# Altium PCB ERM_OPTO_Long.PcbDoc (part 2 of 2)
Units mil, origin at the board's own origin, x right, y up, seen from the top; angles counter-clockwise.
Board outline 4606.3 x 1102.36 mil, 7 copper layers (Layer_1 Top, Layer_2 GND Plane 1, Layer_3 Inner Signal 1, Layer_4 GND Plane 2, Layer_5 Inner Signal 2, Layer_6 GND Plane 3, Layer_7 Bottom), stack 37.12 mil thick; 33 components, 65 nets, 204 pads, 130 vias.
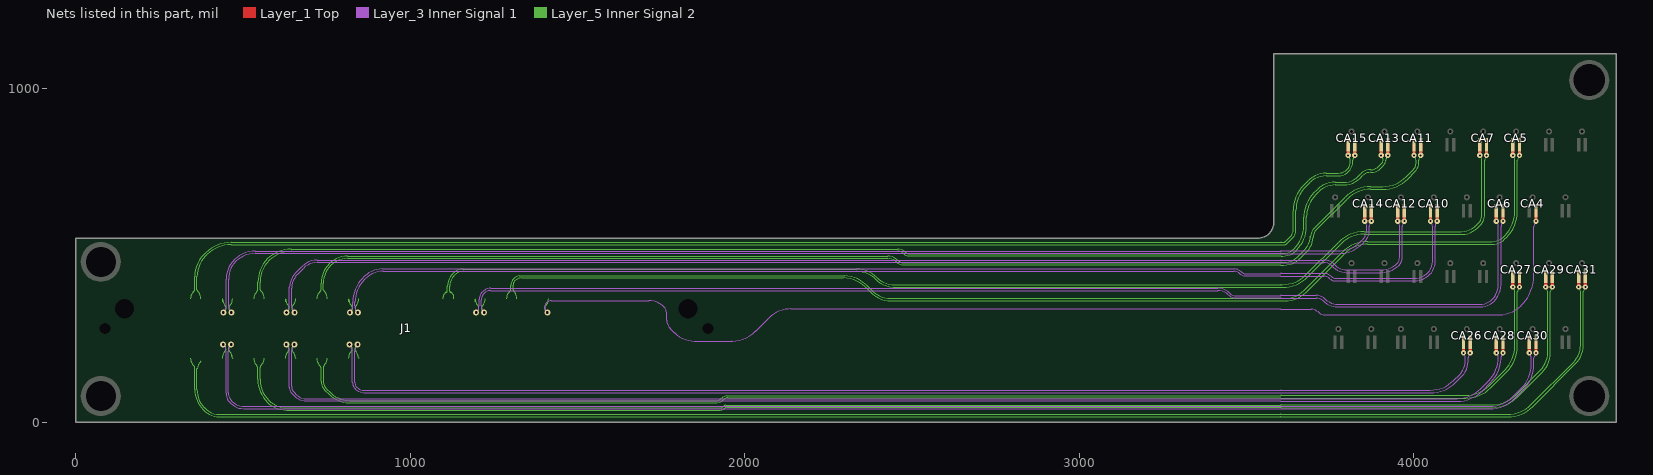
[diagram p7: the nets of this part, all layers, seen from the top]

## Via types
v1: diameter 18, hole 8, Layer_3 Inner Signal 1 to Layer_5 Inner Signal 2, tented both sides, 66 vias
v2: diameter 16, hole 6, Layer_1 Top to Layer_7 Bottom, tented both sides, 64 vias

## Nets (pads, with @x,y where several pads share a name; then routed paths per layer and width w, separated by ;. In a path a pad name is that pad's centre, name@x,y a point inside that pad or via, vN(x,y) a via of type N, cw(c..) or ccw(c..) an arc to the next point about the centre after c; other vN are vias at no path point) (continued)
UPLINK8_P: CA4.1 J1.24 | length 3404
  Layer_1 Top w10: v2(4366.3,601.73) CA4.1@4366.3,633.23
  Layer_3 Inner Signal 1 w2.95: v1(1410.23,328.57) 1406.13,332.66 cw(c1417.97,344.5) 1402.85,337.3 cw(c1417.97,344.5) 1401.85,339.97 cw(c1404.7,340.74) 1401.92,341.73 1401.92,345.13 cw(c1419.57,345.13) 1407.14,357.66 cw(c1422.4,342.3) 1422.4,363.95 1712.77,363.95 cw(c1712.77,297.57) 1759.74,344.48 cw(c1743.54,328.34) 1766.41,328.34 1766.41,306.83 cw(c1763.6,305.91) 1766.54,306.16 ccw(c1810.28,309.6) 1776.92,281.1 cw(c1774.66,279.2) 1777.3,280.54 1779.18,278.66 cw(c1777.11,276.55) 1779.25,278.58 1779.32,278.51 1788.01,269.83 ; 1788.04,269.8 1788.13,269.71 ; 1788.16,269.68 1789.68,268.16 ; 1789.68,268.15 ccw(c1791.79,270.22) 1789.72,268.11 1790.03,267.81 cw(c1788.4,265.34) 1790.4,267.51 ccw(c1852.67,334.37) 1849.43,243.06 cw(c1849.31,240.11) 1849.9,243.01 1962.08,243.01 cw(c1962.62,240.1) 1962.52,243.06 ccw(c1959.31,349.7) 2032.45,272.02 cw(c2034.46,269.86) 2032.79,272.3 2072.63,312.14 cw(c2138.64,246.19) 2084.37,322.09 cw(c2142.94,235.17) 2121.95,337.86 cw(c2142.94,235.17) 2122.08,337.89 cw(c2138.15,246.68) 2138.15,339.29 3602.48,339.29 cw(c3602.48,337.59) 3603.68,338.79 3603.95,338.52 3695.08,338.52 cw(c3695.08,310.63) 3714.8,330.35 ; 3714.82,330.33 ccw(c3734.64,350.15) 3734.64,322.13 4256.21,322.13 ccw(c4256.21,415.86) 4322.49,349.58 4322.72,349.81 ccw(c4231.91,440.62) 4346.37,382.39 ccw(c4231.91,440.62) 4360.33,440.62 4360.33,587.33 cw(c4375.17,587.33) 4362.05,594.25 cw(c4375.17,587.33) 4364.68,597.82 ccw(c4360.77,601.73) v2(4366.3,601.73)
  Layer_5 Inner Signal 2 w3: v1(1410.23,328.57) 1405.57,333.22 cw(c1414.75,342.39) 1401.78,342.39 cw(c1409.97,342.39) 1404.16,348.17 1405.33,349.34 ccw(c1385.17,369.5) J1.24@1413.68,369.5
UPLINK9_N: CA5.2 J1.32 | length 3401.1
  Layer_1 Top w10: v2(4297.09,798.58) CA5.2@4297.09,830.08
  Layer_5 Inner Signal 2 w2.95: J1.32@1287.7,369.5 cw(c1317.32,369.5) 1296.37,390.45 1297.26,391.33 ccw(c1289.57,399.02) 1300.44,399.02 1300.44,408.76 cw(c1328.14,408.76) 1308.56,428.34 cw(c1332.78,406.96) 1326.53,438.66 1330.71,438.66 1336.25,438.66 2298.68,438.66 cw(c2296,341.35) 2363.16,411.82 2381.17,393.81 ccw(c2437.07,449.67) 2437.07,370.64 3602.6,370.64 cw(c3604.07,369.17) 3604.07,371.25 3615.55,371.25 ccw(c3615.55,453.08) 3673.41,395.22 3787.41,509.22 cw(c3863.71,432.93) 3863.71,540.83 4235.18,540.83 ccw(c4235.18,587.34) 4268.07,554.45 4273.76,560.14 ccw(c4203.05,630.85) 4303.05,630.85 4303.05,784.18 ccw(c4288.21,784.18) 4298.71,794.68 cw(c4302.61,798.58) v2(4297.09,798.58)
UPLINK9_P: CA5.1 J1.30 | length 3402.4
  Layer_1 Top w10: v2(4317.09,798.58) CA5.1@4317.09,830.08
  Layer_5 Inner Signal 2 w2.95: J1.30@1319.19,369.5 ccw(c1285.53,369.5) 1309.33,393.31 cw(c1313.27,397.24) 1307.7,397.24 1307.7,410.59 cw(c1326.31,410.59) 1308.76,416.79 cw(c1326.31,410.59) 1308.92,417.23 cw(c1311.66,416.13) 1308.96,417.3 cw(c1328.14,408.76) 1313.27,423.59 cw(c1333.48,403.4) 1333.48,431.97 2295.62,431.97 cw(c2295.58,340.32) 2360.39,405.12 2376.46,389.06 ccw(c2437.07,449.67) 2437.07,363.95 3602.6,363.95 cw(c3602.6,362.25) 3603.8,363.45 3604.07,363.18 3608.17,363.18 3615.7,363.18 ccw(c3615.7,452.73) 3679.01,389.41 3793.07,503.47 cw(c3863.78,432.76) 3863.78,532.76 4235.22,532.76 ccw(c4235.22,587.25) 4273.75,548.72 4279.52,554.48 ccw(c4203.22,630.78) 4311.12,630.78 4311.12,784.18 cw(c4325.96,784.18) 4315.47,794.68 ccw(c4311.56,798.58) v2(4317.09,798.58)
UPLINK10_N: CA6.2 J1.38 | length 3431.8
  Layer_1 Top w10: v2(4247.87,601.73) CA6.2@4247.87,633.23
  Layer_3 Inner Signal 1 w2.95: v1(1197.25,328.57) ccw(c1176.36,349.46) 1205.9,349.46 1205.9,368.89 cw(c1234.21,368.89) 1214.19,388.9 1216.18,390.89 cw(c1240.84,366.23) 1226.27,397.91 cw(c1240.84,366.23) 1240.84,401.1 3414.37,401.1 cw(c3414.37,348.98) 3451.23,385.84 ccw(c3467.22,401.82) 3467.22,379.21 3602.48,379.21 cw(c3603.96,377.74) 3603.96,379.82 3627.62,379.82 ; 3627.66,379.82 3709.93,379.82 cw(c3709.93,343.88) 3715.65,379.37 cw(c3709.93,343.88) 3735.34,369.3 3735.43,369.21 ccw(c3773.07,406.85) 3761.6,354.87 ccw(c3773.07,406.85) 3773.07,353.62 4199.38,353.62 ccw(c4199.38,405.1) 4235.79,368.7 ccw(c4192.21,412.28) 4253.84,412.28 4253.84,587.33 ccw(c4239,587.33) 4252.13,594.25 ccw(c4239,587.33) 4249.49,597.82 cw(c4253.4,601.73) v2(4247.87,601.73)
  Layer_5 Inner Signal 2 w3: J1.38@1193.21,369.5 J1.38@1194.58,368.13 ; J1.38@1194.83,360.43 1194.83,367.52 ccw(c1222.49,367.52) 1202.93,347.97 cw(c1196.57,341.61) 1205.57,341.61 cw(c1194.16,341.61) 1202.23,333.54 v1(1197.25,328.57)
UPLINK10_P: CA6.1 J1.36 | length 3427.2
  Layer_1 Top w10: v2(4267.87,601.73) CA6.1@4267.87,633.23
  Layer_3 Inner Signal 1 w2.95: v1(1221.25,328.57) cw(c1242.14,349.46) 1212.6,349.46 1212.6,366.12 cw(c1240.9,366.12) 1220.89,386.13 cw(c1240.87,366.15) 1230.09,392.27 cw(c1240.87,366.15) 1240.87,394.41 3414.37,394.41 cw(c3414.37,348.98) 3446.5,381.1 ccw(c3467.22,401.82) 3467.22,372.52 3602.48,372.52 cw(c3602.48,370.82) 3603.68,372.02 3603.95,371.75 3709.81,371.75 cw(c3709.81,343.59) 3714.03,371.44 cw(c3709.81,343.59) 3729.72,363.5 ; 3729.75,363.48 ccw(c3773.04,406.77) 3760.34,346.88 ccw(c3773.04,406.77) 3773.04,345.55 4199.43,345.55 ccw(c4199.43,404.98) 4241.46,362.96 4241.59,363.09 ccw(c4192.52,412.15) 4261.91,412.15 4261.91,587.33 cw(c4276.75,587.33) 4263.62,594.25 cw(c4276.75,587.33) 4266.26,597.82 ccw(c4262.35,601.73) v2(4267.87,601.73)
  Layer_5 Inner Signal 2 w3: v1(1221.25,328.57) 1216.6,333.22 cw(c1225.77,342.39) 1212.8,342.39 cw(c1220.99,342.39) 1215.19,348.17 1216.35,349.34 ccw(c1196.19,369.5) J1.36@1224.7,369.5
UPLINK11_N: CA7.2 J1.44 | length 3471.7
  Layer_1 Top w10: v2(4198.66,798.58) CA7.2@4198.66,830.08
  Layer_5 Inner Signal 2 w2.95: J1.44@1098.72,369.5 1098.72,375.4 cw(c1113,375.4) 1102.9,385.49 1106.27,388.86 cw(c1108.24,386.89) 1108.24,389.68 ccw(c1108.24,392.46) 1110.21,390.49 ccw(c1108,392.7) 1111.12,392.7 1111.12,406.54 cw(c1164.32,406.54) 1120.29,436.4 cw(c1164.32,406.54) 1126.7,444.16 1129.02,446.48 cw(c1157.95,417.55) 1157.95,458.46 2334.12,458.46 cw(c2334.12,369.62) 2396.94,432.44 ccw(c2447.53,483.03) 2447.53,411.49 3602.6,411.49 cw(c3604.07,410.01) 3604.07,412.1 3608.42,412.1 ccw(c3608.42,511) 3678.35,441.07 3776.55,539.26 cw(c3852.84,462.97) 3852.84,570.87 4143.1,570.87 ccw(c4143.1,633.52) 4187.37,589.18 ; 4187.41,589.22 4194.2,596.01 ; 4194.22,596.03 ccw(c4169.02,621.19) 4204.63,621.19 4204.63,784.18 ccw(c4189.79,784.18) 4200.28,794.68 cw(c4204.19,798.58) v2(4198.66,798.58)
UPLINK11_P: CA7.1 J1.42 | length 3474.7
  Layer_1 Top w10: v2(4218.66,798.58) CA7.1@4218.66,830.08
  Layer_5 Inner Signal 2 w2.95: J1.42@1130.22,369.5 1130.22,375.4 ccw(c1115.93,375.4) 1126.03,385.49 1122.66,388.86 ccw(c1120.7,386.89) 1120.7,389.68 cw(c1120.7,392.46) 1118.73,390.49 cw(c1120.94,392.7) 1117.81,392.7 1117.81,406.5 cw(c1164.42,406.5) 1125.46,432.08 cw(c1164.42,406.5) 1131.46,439.46 1133.74,441.73 cw(c1157.98,417.5) 1157.98,451.77 2334.12,451.77 cw(c2334.12,369.62) 2392.36,427.56 ccw(c2447.53,483.03) 2444.26,404.86 cw(c2444.11,401.91) 2444.76,404.79 3602.6,404.79 cw(c3602.6,403.1) 3603.8,404.3 3604.07,404.03 3608.57,404.03 ccw(c3608.57,510.62) 3667.7,421.93 ccw(c3608.57,510.62) 3683.94,435.25 3782.2,533.51 cw(c3852.91,462.8) 3852.91,562.8 4146.44,562.8 ccw(c4146.44,625.45) 4190.72,581.11 4202.27,592.66 ccw(c4177.09,617.84) 4212.7,617.84 4212.7,784.18 cw(c4227.54,784.18) 4217.04,794.68 ccw(c4213.14,798.58) v2(4218.66,798.58)
UPLINK12_N: CA26.1 J1.61 | length 3620.4
  Layer_1 Top w10: v2(4169.45,208.03) CA26.1@4169.45,239.53
  Layer_3 Inner Signal 1 w2.95: v1(818.71,233.27) cw(c797.82,212.38) 827.36,212.38 827.36,120.18 ccw(c855.87,120.18) 830.69,106.82 ccw(c855.87,120.18) 835.71,100.02 835.77,99.96 ccw(c861.15,125.35) 861.15,89.45 871.77,89.45 ; 872.35,89.45 910.75,89.45 3582.72,89.45 3602.52,89.45 cw(c3602.52,87.75) 3603.72,88.95 3603.99,88.68 3627.7,88.68 4050.26,88.68 ccw(c4050.26,196.58) 4126.56,120.29 4146.23,139.95 ; 4146.25,139.98 ccw(c4104.57,181.61) 4163.48,181.61 4163.48,193.63 cw(c4178.32,193.63) 4165.2,200.55 cw(c4178.32,193.63) 4167.83,204.12 ccw(c4163.92,208.03) v2(4169.45,208.03)
  Layer_5 Inner Signal 2 w3: J1.61@815.26,192.33 cw(c843.77,192.33) 823.61,212.5 824.76,213.65 ccw(c818.97,219.44) 827.16,219.44 ccw(c814.19,219.44) 823.36,228.62 v1(818.71,233.27)
UPLINK12_P: CA26.2 J1.59 | length 3604
  Layer_1 Top w10: v2(4149.45,208.03) CA26.2@4149.45,239.53
  Layer_3 Inner Signal 1 w2.95: v1(842.71,233.27) ccw(c863.6,212.38) 834.06,212.38 834.06,120.22 ccw(c855.96,120.22) 836.11,110.96 ccw(c855.96,120.22) 840.47,104.72 ccw(c861.19,125.44) 861.19,96.14 3582.64,96.14 3602.52,96.14 cw(c3604,94.67) 3604,96.75 3626.96,96.75 3690.28,96.75 3995.87,96.75 4050.19,96.75 ccw(c4050.19,196.75) 4120.9,126.04 4138.16,143.3 ; 4138.18,143.32 ccw(c4096.5,184.95) 4155.41,184.95 4155.41,193.63 ccw(c4140.58,193.63) 4153.7,200.55 ccw(c4140.58,193.63) 4151.07,204.12 cw(c4154.97,208.03) v2(4149.45,208.03)
  Layer_5 Inner Signal 2 w3: v1(842.71,233.27) 837.73,228.29 ccw(c845.8,220.23) 834.39,220.23 ccw(c843.39,220.23) 837.03,213.87 cw(c817.47,194.31) 845.13,194.31 J1.59@845.13,201.4 ; J1.59@845.38,193.71 J1.59@846.75,192.33
UPLINK13_N: CA27.1 J1.67 | length 3975.8
  Layer_1 Top w10: v2(4317.09,404.88) CA27.1@4317.09,436.38
  Layer_5 Inner Signal 2 w2.95: J1.67@720.77,192.33 ccw(c754.43,192.33) 730.63,168.53 ; 730.66,168.5 cw(c723.66,161.56) 733.51,161.56 733.51,123.9 ccw(c771.9,123.9) 744.76,96.76 757.54,83.97 ccw(c818.87,145.3) 818.83,58.57 1913.67,58.57 ccw(c1913.67,90.76) 1936.7,68.26 cw(c1949.51,54.99) 1949.51,73.44 3602.52,73.44 cw(c3602.52,71.74) 3603.72,72.94 3603.99,72.67 4155.65,72.67 ccw(c4155.65,180.39) 4231.82,104.22 4279.52,151.92 ccw(c4203.22,228.22) 4311.12,228.22 4311.12,390.48 cw(c4325.96,390.48) 4315.47,400.97 ccw(c4311.56,404.88) v2(4317.09,404.88)
UPLINK13_P: CA27.2 J1.65 | length 3965.3
  Layer_1 Top w10: v2(4297.09,404.88) CA27.2@4297.09,436.38
  Layer_5 Inner Signal 2 w2.95: J1.65@752.26,192.33 cw(c722.64,192.33) 743.59,171.39 742.7,170.5 ccw(c750.39,162.81) 740.14,166.44 ccw(c742.93,165.48) 740.21,164.33 740.21,123.9 ccw(c771.9,123.9) 749.52,101.46 762.34,88.64 ccw(c818.87,145.3) 818.74,65.26 1913.74,65.26 ccw(c1913.67,90.76) 1931.88,72.91 cw(c1936.7,68.26) 1932.02,73.05 cw(c1949.51,54.99) 1945.9,79.87 ccw(c1945.45,82.79) 1946.73,80.13 3595.32,80.13 ; 3582.64,80.13 3595.32,80.13 ; v2(4297.09,404.88) ccw(c4302.61,404.88) 4298.71,400.97 cw(c4288.21,390.48) 4303.05,390.48 4303.05,228.29 cw(c4203.05,228.29) 4273.76,157.58 4226.21,110.03 cw(c4155.5,180.74) 4155.5,80.74 3626.96,80.74 3604,80.74 ccw(c3604,78.65) 3602.52,80.13 3595.32,80.13
UPLINK14_N: CA28.1 J1.73 | length 3939
  Layer_1 Top w10: v2(4267.87,208.03) CA28.1@4267.87,239.53
  Layer_3 Inner Signal 1 w2.95: v1(629.73,233.27) cw(c608.84,212.38) 638.39,212.38 638.39,105.24 ccw(c663.75,105.24) 645.79,87.32 ; 645.82,87.3 654.4,78.71 ccw(c689.41,113.72) 689.36,64.21 3582.68,64.21 3602.48,64.21 cw(c3602.48,62.51) 3603.68,63.72 3603.95,63.45 3627.66,63.45 4130.52,63.45 ccw(c4130.52,171.35) 4206.82,95.05 4230.31,118.54 ccw(c4154.01,194.84) 4230.37,118.6 ccw(c4154.01,194.84) 4258.12,166.48 ccw(c4154.01,194.84) 4261.81,190.19 ccw(c4154.01,194.84) 4261.91,194.84 4261.91,196.42 cw(c4267.76,196.42) 4263.62,200.55 cw(c4276.75,193.63) 4266.26,204.12 ccw(c4262.35,208.03) v2(4267.87,208.03)
  Layer_5 Inner Signal 2 w3: J1.73@626.28,192.33 cw(c654.79,192.33) 634.63,212.5 635.79,213.66 ccw(c629.99,219.44) 638.18,219.44 ccw(c625.21,219.44) 634.39,228.62 v1(629.73,233.27)
UPLINK14_P: CA28.2 J1.71 | length 3922.2
  Layer_1 Top w10: v2(4247.87,208.03) CA28.2@4247.87,239.53
  Layer_3 Inner Signal 1 w2.95: v1(653.73,233.27) ccw(c674.62,212.38) 645.08,212.38 645.08,108.01 ccw(c670.45,108.01) 652.51,90.07 659.07,83.51 ; v2(4247.87,208.03) ccw(c4253.4,208.03) 4249.49,204.12 cw(c4239,193.63) 4252.13,200.55 cw(c4247.99,196.42) 4253.84,196.42 4253.84,194.91 cw(c4153.84,194.91) 4253.83,193.99 cw(c4153.84,194.91) 4253.83,193.63 cw(c4153.84,194.91) 4250.05,167.63 cw(c4153.84,194.91) 4224.55,124.2 4201.16,100.81 cw(c4130.45,171.52) 4130.45,71.52 4057.05,71.52 3681.88,71.52 3626.92,71.52 3603.96,71.52 ccw(c3603.96,69.43) 3602.48,70.91 689.31,70.91 cw(c689.41,113.72) 659.14,83.44 ; 659.07,83.51 ccw(c689.41,113.72) 659.14,83.44 ; 659.07,83.51 659.14,83.44
  Layer_5 Inner Signal 2 w3: v1(653.73,233.27) 648.76,228.29 ccw(c656.82,220.23) 645.42,220.23 ccw(c654.41,220.23) 648.05,213.87 cw(c628.5,194.31) 656.15,194.31 J1.71@656.15,201.4 ; J1.71@656.4,193.71 J1.71@657.77,192.33
UPLINK15_N: CA29.1 J1.79 | length 4297.4
  Layer_1 Top w10: v2(4415.51,404.88) CA29.1@4415.51,436.38
  Layer_5 Inner Signal 2 w2.95: J1.79@531.79,192.33 ccw(c564.2,192.33) 541.28,169.42 cw(c534.14,162.27) 544.24,162.27 544.24,128.69 ccw(c639.89,128.69) 572.26,61.06 ccw(c630.36,119.16) 630.31,36.99 1926.92,36.99 ccw(c1926.92,58.38) 1942.04,43.26 cw(c1947.3,38) 1947.3,45.44 3602.72,45.44 cw(c3602.72,43.74) 3603.92,44.94 3604.19,44.67 4235.17,44.67 ccw(c4235.17,152.39) 4311.33,76.22 4385.34,150.22 ccw(c4326.9,208.67) 4409.55,208.67 4409.55,390.48 cw(c4424.39,390.48) 4413.89,400.97 ccw(c4409.99,404.88) v2(4415.51,404.88)
UPLINK15_P: CA29.2 J1.77 | length 4287.2
  Layer_1 Top w10: v2(4395.51,404.88) CA29.2@4395.51,436.38
  Layer_5 Inner Signal 2 w2.95: J1.77@563.29,192.33 cw(c533.53,192.33) 554.57,171.3 ccw(c565.03,160.84) 552.24,168.26 ccw(c565.03,160.84) 550.94,165.32 550.94,128.69 ccw(c639.89,128.69) 576.9,65.88 ccw(c630.36,119.16) 630.23,43.69 1926.97,43.69 ccw(c1926.92,58.38) 1937.29,47.97 cw(c1947.3,38) 1943.53,51.62 ccw(c1942.71,54.45) 1944.53,52.13 3595.75,52.13 ; 3582.83,52.13 3595.75,52.13 ; v2(4395.51,404.88) ccw(c4401.04,404.88) 4397.13,400.97 cw(c4386.64,390.48) 4401.48,390.48 4401.48,208.7 cw(c4326.81,208.7) 4379.61,155.91 4305.73,82.03 cw(c4235.02,152.74) 4235.02,52.74 3627.16,52.74 3604.19,52.74 ccw(c3604.19,50.65) 3602.72,52.13 3595.75,52.13
UPLINK16_N: CA30.1 J1.85 | length 4270.5
  Layer_1 Top w10: v2(4366.3,208.03) CA30.1@4366.3,239.53
  Layer_3 Inner Signal 1 w2.95: v1(440.76,233.27) cw(c419.86,212.38) 449.41,212.38 449.41,86.68 ccw(c486.01,86.68) 460.11,60.82 ; 460.13,60.8 464.05,56.88 ; 464.06,56.87 ccw(c501.57,94.39) 501.57,41.34 3582.72,41.34 3602.52,41.34 cw(c3602.52,39.64) 3603.72,40.84 3603.99,40.57 ; 3604.31,40.57 4228.15,40.57 ccw(c4228.15,146.88) 4303.32,71.71 4328.73,97.12 ccw(c4252.43,173.42) 4360.33,173.42 4360.33,193.63 cw(c4375.17,193.63) 4362.05,200.55 cw(c4375.17,193.63) 4364.68,204.12 ccw(c4360.77,208.03) v2(4366.3,208.03)
  Layer_5 Inner Signal 2 w3: J1.85@437.3,192.33 cw(c465.82,192.33) 445.65,212.5 446.82,213.66 ccw(c441.02,219.44) 449.21,219.44 ccw(c436.24,219.44) 445.41,228.62 v1(440.76,233.27)
UPLINK16_P: CA30.2 J1.83 | length 4281.8
  Layer_1 Top w10: v2(4346.3,208.03) CA30.2@4346.3,239.53
  Layer_3 Inner Signal 1 w2.95: v1(464.76,233.27) ccw(c485.65,212.38) 456.1,212.38 456.1,89.45 ccw(c492.7,89.45) 466.8,63.59 ; 466.83,63.56 ccw(c504.34,101.09) 504.34,48.03 3586.46,48.03 ; 3582.64,48.03 3602.52,48.03 cw(c3604,46.56) 3604,48.64 3626.96,48.64 ; 3605.83,48.64 3682,48.64 4079.33,48.64 4228.11,48.64 ccw(c4228.11,146.96) 4297.6,77.4 ; 4295.27,75.08 4297.6,77.4 ; v2(4346.3,208.03) ccw(c4351.83,208.03) 4347.92,204.12 cw(c4337.43,193.63) 4350.55,200.55 cw(c4337.43,193.63) 4352.26,193.63 4352.26,173.49 cw(c4252.26,173.49) 4322.97,102.78 4297.6,77.4
  Layer_5 Inner Signal 2 w3: v1(464.76,233.27) 459.78,228.29 ccw(c467.84,220.23) 456.44,220.23 ccw(c465.44,220.23) 459.08,213.87 cw(c439.52,194.31) 467.18,194.31 J1.83@467.18,201.4 ; J1.83@467.43,193.71 J1.83@468.8,192.33
UPLINK17_N: CA31.1 J1.91 | length 4604.7
  Layer_1 Top w10: v2(4513.94,404.88) CA31.1@4513.94,436.38
  Layer_5 Inner Signal 2 w2.95: J1.91@342.81,192.33 ccw(c372.87,192.33) 351.62,171.08 353.18,169.52 cw(c347.39,163.75) 355.56,163.75 355.56,98.51 ccw(c439,98.51) 366.55,57.13 ccw(c439,98.51) 380,39.51 ccw(c429.25,82.67) 429.25,17.19 3582.56,17.19 3602.36,17.19 cw(c3602.36,15.49) 3603.56,16.69 3603.83,16.42 3627.54,16.42 4281.49,16.42 ccw(c4281.49,124.32) 4357.79,48.03 4484.55,174.79 ccw(c4428.01,231.33) 4507.97,231.33 4507.97,390.48 cw(c4522.81,390.48) 4512.32,400.97 ccw(c4508.41,404.88) v2(4513.94,404.88)
UPLINK17_P: CA31.2 J1.89 | length 4585
  Layer_1 Top w10: v2(4493.94,404.88) CA31.2@4493.94,436.38
  Layer_5 Inner Signal 2 w2.95: J1.89@374.31,183 ccw(c405.09,152.22) 362.45,160.98 ccw(c405.09,152.22) 362.26,159.96 362.26,98.51 ccw(c439,98.51) 384.75,44.23 cw(c380,39.51) 385.06,43.9 ccw(c429.25,82.67) 429.14,23.88 3595.75,23.88 ; 3582.48,23.88 3602.36,23.88 cw(c3603.84,22.41) 3603.84,24.49 3626.8,24.49 4281.42,24.49 ccw(c4281.42,124.49) 4352.13,53.78 4478.74,180.39 ccw(c4427.65,231.48) 4499.9,231.48 4499.9,390.48 ccw(c4485.06,390.48) 4495.56,400.97 cw(c4499.46,404.88) v2(4493.94,404.88)
UPLINK18_N: CA10.2 J1.62 | length 3562.7
  Layer_1 Top w10: v2(4051.02,601.73) CA10.2@4051.02,633.23
  Layer_3 Inner Signal 1 w2.95: v1(819.3,328.57) ccw(c798.41,349.46) 827.95,349.46 827.95,358.63 cw(c930.9,358.63) 858.1,431.42 863.15,436.47 ; 863.18,436.5 cw(c917.2,382.42) 917.2,458.86 3463.72,458.86 cw(c3463.72,429.68) 3484.35,450.31 ; 3484.38,450.28 ccw(c3496.94,462.85) 3496.94,445.08 3602.56,445.08 cw(c3604.04,443.6) 3604.04,445.69 3627.7,445.69 ; 3627.74,445.69 3731.87,445.69 ; 3731.92,445.69 cw(c3731.92,412.46) 3755.42,435.96 3755.46,435.92 ccw(c3766.61,447.07) 3766.61,431.3 4001.86,431.3 ccw(c4001.86,490.31) 4043.58,448.58 ccw(c4011.22,480.95) 4056.99,480.95 4056.99,587.33 ccw(c4042.15,587.33) 4052.64,597.83 cw(c4056.55,601.73) v2(4051.02,601.73)
  Layer_5 Inner Signal 2 w3: J1.62@815.26,369.5 J1.62@816.63,368.13 ; J1.62@816.88,360.43 816.88,367.52 ccw(c844.53,367.52) 824.98,347.97 cw(c818.62,341.61) 827.61,341.61 cw(c816.21,341.61) 824.27,333.54 v1(819.3,328.57)
UPLINK18_P: CA10.1 J1.60 | length 3558.1
  Layer_1 Top w10: v2(4071.02,601.73) CA10.1@4071.02,633.23
  Layer_3 Inner Signal 1 w2.95: v1(843.3,328.57) cw(c864.19,349.46) 834.64,349.46 834.64,358.49 cw(c931.23,358.49) 862.93,426.78 865.96,429.81 cw(c919.98,375.72) 919.98,452.17 3463.68,452.17 cw(c3463.68,429.58) 3479.65,445.55 3479.68,445.51 ccw(c3496.89,462.72) 3496.89,438.39 3602.56,438.39 cw(c3602.56,436.69) 3603.76,437.89 3604.03,437.62 3627.74,437.62 3706.09,437.62 3731.87,437.62 cw(c3731.87,412.33) 3749.75,430.21 3749.81,430.16 ccw(c3766.53,446.88) 3766.53,423.23 4001.89,423.23 ccw(c4001.89,490.22) 4049.26,442.85 4049.37,442.96 ccw(c4011.5,480.83) 4065.06,480.83 4065.06,587.33 cw(c4079.9,587.33) 4069.41,597.82 ccw(c4065.5,601.73) v2(4071.02,601.73)
  Layer_5 Inner Signal 2 w3: v1(843.3,328.57) 838.64,333.22 cw(c847.82,342.39) 834.85,342.39 cw(c843.04,342.39) 837.24,348.17 838.4,349.34 ccw(c818.24,369.5) J1.60@846.75,369.5
UPLINK19_N: CA11.2 J1.68 | length 3569.7
  Layer_1 Top w10: v2(4001.81,798.58) CA11.2@4001.81,830.08
  Layer_5 Inner Signal 2 w2.95: J1.68@720.77,369.5 cw(c750.39,369.5) 729.44,390.45 730.33,391.33 ccw(c722.64,399.02) 733.51,399.02 733.51,415.72 cw(c816.28,415.72) 757.76,474.24 cw(c812.62,419.38) 812.62,496.97 2427.7,496.97 cw(c2427.65,452.35) 2459.2,483.9 ccw(c2473.84,498.54) 2473.84,477.84 3602.6,477.84 cw(c3604.07,476.36) 3604.07,478.45 3612.6,478.45 ccw(c3612.6,538) 3652.43,493.73 ccw(c3612.6,538) 3652.57,493.85 ccw(c3612.6,538) 3654.68,495.86 ; 3654.71,495.89 3674.7,515.88 ; 3674.72,515.9 ccw(c3633.1,557.48) 3691.93,557.48 ; 3691.93,554.22 cw(c3728.49,554.22) 3702.64,580.07 3796.31,673.75 cw(c3872.61,597.45) 3872.61,705.35 3907.55,705.35 ccw(c3907.55,805.35) 3978.27,734.64 3999.72,756.1 ccw(c3980.26,775.55) 4007.78,775.55 4007.78,784.18 ccw(c3992.94,784.18) 4003.43,794.68 cw(c4007.34,798.58) v2(4001.81,798.58)
UPLINK19_P: CA11.1 J1.66 | length 3568.8
  Layer_1 Top w10: v2(4021.81,798.58) CA11.1@4021.81,830.08
  Layer_5 Inner Signal 2 w2.95: J1.66@752.26,369.5 ccw(c718.6,369.5) 742.89,392.8 ccw(c718.6,369.5) 742.34,393.37 cw(c749.37,400.28) 740.21,396.65 740.21,415.72 cw(c816.28,415.72) 762.49,469.51 cw(c812.62,419.38) 812.62,490.28 2427.6,490.28 cw(c2427.65,452.35) 2454.53,479.1 ccw(c2473.84,498.54) 2470.24,471.38 2471.07,471.14 3602.6,471.14 cw(c3602.6,469.45) 3603.8,470.65 3604.07,470.38 3612.74,470.38 ccw(c3612.74,537.67) 3658.05,487.92 ccw(c3612.74,537.67) 3660.32,490.09 3682.77,512.54 ccw(c3641.17,554.14) 3700,554.14 cw(c3728.7,554.14) 3708.41,574.43 3801.97,667.99 cw(c3872.68,597.28) 3872.68,697.28 3907.63,697.28 ccw(c3907.63,805.18) 3983.92,728.89 4005.49,750.45 ccw(c3980.49,775.46) 4015.85,775.46 4015.85,784.18 cw(c4030.68,784.18) 4020.19,794.68 ccw(c4016.29,798.58) v2(4021.81,798.58)
UPLINK20_N: CA12.2 J1.74 | length 3698.6
  Layer_1 Top w10: v2(3952.6,601.73) CA12.2@3952.6,633.23
  Layer_3 Inner Signal 1 w2.95: 638.97,378.43 638.97,403.59 ; 638.97,403.62 cw(c699.72,403.59) 656.77,446.55 676.36,466.14 cw(c721.98,420.52) 721.98,485.04 3590.24,485.04 3602.6,485.04 cw(c3604.07,483.56) 3604.07,485.65 3729.63,485.65 ; 3763.85,472.83 ccw(c3732.91,441.89) 3732.91,485.65 3729.63,485.65 ; v2(3952.6,601.73) ccw(c3958.12,601.73) 3954.22,597.82 cw(c3943.72,587.33) 3958.56,587.33 3958.56,492.97 cw(c3934.44,492.97) 3951.5,475.91 cw(c3903.78,523.62) 3938.44,465.72 cw(c3903.78,523.62) 3903.78,456.14 3800.81,456.14 cw(c3800.81,505.06) 3766.22,470.47 3766.18,470.51 ccw(c3729.63,433.96) 3729.63,485.65
  Layer_3 Inner Signal 1 w3: v1(630.32,328.57) ccw(c609.49,349.4) 638.95,349.4 638.95,378.41
  Layer_5 Inner Signal 2 w3: J1.74@626.28,369.5 J1.74@627.65,368.13 ; J1.74@627.9,360.43 627.9,367.52 ccw(c655.56,367.52) 636,347.97 cw(c629.64,341.61) 638.64,341.61 cw(c627.23,341.61) 635.3,333.54 v1(630.32,328.57)
UPLINK20_P: CA12.1 J1.72 | length 3656.3
  Layer_1 Top w10: v2(3972.6,601.73) CA12.1@3972.6,633.23
  Layer_3 Inner Signal 1 w2.95: 645.67,375.66 645.67,400.82 cw(c706.41,400.82) 645.7,402.81 cw(c706.41,400.82) 646.33,409.79 cw(c706.41,400.82) 663.46,443.77 681.02,461.34 cw(c722.08,420.28) 722.08,478.35 3602.6,478.35 cw(c3602.6,476.65) 3603.8,477.85 3604.07,477.58 3729.57,477.58 cw(c3729.57,433.82) 3760.51,464.76 ; 3760.53,464.74 ccw(c3800.78,504.99) 3800.78,448.07 3904.13,448.07 ccw(c3904.13,522.78) 3943.24,459.12 ccw(c3904.13,522.78) 3956.96,469.95 3957.23,470.22 ccw(c3934.52,492.93) 3966.63,492.93 3966.63,587.33 cw(c3981.47,587.33) 3970.98,597.82 ccw(c3967.07,601.73) v2(3972.6,601.73)
  Layer_3 Inner Signal 1 w3: 645.69,375.64 645.69,349.4 ccw(c675.16,349.4) v1(654.32,328.57)
  Layer_5 Inner Signal 2 w3: v1(654.32,328.57) 649.67,333.22 cw(c658.84,342.39) 645.87,342.39 cw(c654.06,342.39) 648.26,348.17 649.42,349.34 ccw(c629.26,369.5) J1.72@657.77,369.5
UPLINK21_N: CA13.2 J1.80 | length 3687.3
  Layer_1 Top w10: v2(3903.39,798.58) CA13.2@3903.39,830.08
  Layer_5 Inner Signal 2 w2.95: J1.80@531.79,369.5 cw(c561.42,369.5) 540.47,390.45 541.35,391.33 ccw(c533.66,399.02) 544.54,399.02 544.54,419.71 cw(c642.59,419.71) 573.26,489.04 cw(c643.72,418.58) 643.72,518.23 2457.32,518.23 cw(c2457.25,483.45) 2481.84,508.04 ccw(c2489.34,515.54) 2489.34,504.94 3602.52,504.94 cw(c3604,503.46) 3604,505.55 3609.74,505.55 ccw(c3609.74,552.84) 3643.18,519.4 ccw(c3573.49,589.09) 3664.49,551.24 ccw(c3573.49,589.09) 3672.05,589.09 3672.05,613.94 cw(c3774.12,613.94) 3672.23,619.97 cw(c3774.12,613.94) 3689.76,671.4 cw(c3774.12,613.94) 3701.94,686.11 3711.67,695.84 cw(c3765.54,641.96) 3724.54,706.18 cw(c3765.54,641.96) 3765.54,718.15 3791.35,718.15 ccw(c3791.35,779.71) 3834.88,736.18 3841.82,743.12 cw(c3872.5,712.45) 3872.5,755.83 3872.6,755.83 ccw(c3872.6,789.54) 3896.43,765.7 3905.21,774.48 ccw(c3895.21,784.47) 3909.35,784.33 ccw(c3895.21,784.47) 3909.35,784.47 ccw(c3895.21,784.47) 3905.21,794.47 3905,794.68 cw(c3908.91,798.58) v2(3903.39,798.58)
UPLINK21_P: CA13.1 J1.78 | length 3689.7
  Layer_1 Top w10: v2(3923.39,798.58) CA13.1@3923.39,830.08
  Layer_5 Inner Signal 2 w2.95: J1.78@563.29,369.5 ccw(c529.62,369.5) 553.92,392.8 ccw(c529.62,369.5) 553.39,393.34 cw(c559.84,399.77) 551.23,396.79 551.23,419.71 cw(c642.59,419.71) 577.99,484.31 cw(c643.72,418.58) 643.72,511.54 2457.27,511.54 cw(c2457.25,483.45) 2477.17,503.25 ; 2477.22,503.21 ccw(c2489.34,515.54) 2485.6,498.65 cw(c2484.95,495.77) 2486.57,498.24 3582.72,498.24 3602.52,498.24 cw(c3602.52,496.55) 3603.72,497.75 3603.99,497.48 3609.83,497.48 ccw(c3609.83,552.61) 3648.82,513.63 3651.25,516.06 ccw(c3581.56,585.75) 3672.56,547.89 ccw(c3581.56,585.75) 3680.12,585.75 3680.12,613.9 cw(c3774.21,613.9) 3680.34,620.42 cw(c3774.21,613.9) 3696.03,666.26 cw(c3774.21,613.9) 3707.68,680.43 3717.28,690.03 cw(c3765.67,641.64) 3729.53,699.76 cw(c3765.67,641.64) 3765.67,710.08 3791.49,710.08 ccw(c3791.49,779.38) 3840.49,730.38 3847.46,737.34 cw(c3872.6,712.2) 3872.6,747.76 3872.66,747.76 ccw(c3872.66,789.38) 3902.1,759.95 3911.12,768.97 ccw(c3895.91,784.18) 3917.42,784.18 cw(c3932.26,784.18) 3921.77,794.68 ccw(c3917.86,798.58) v2(3923.39,798.58)
UPLINK22_N: CA14.2 J1.86 | length 3702.7
  Layer_1 Top w10: v2(3854.17,601.73) CA14.2@3854.17,633.23
  Layer_3 Inner Signal 1 w2.95: v1(441.34,328.57) ccw(c420.45,349.46) 450,349.46 450,428.91 cw(c530.62,428.91) 473.61,485.91 473.71,486.01 cw(c536.95,422.77) 536.95,512.2 3602.48,512.2 cw(c3603.96,510.73) 3603.96,512.82 3683.46,512.82 3733.7,512.82 3772.44,512.82 ccw(c3772.44,614.75) 3791.26,514.57 ccw(c3772.44,614.75) 3844.52,542.67 3847.65,545.8 ccw(c3817.5,575.95) 3860.14,575.95 3860.14,587.33 ccw(c3845.3,587.33) 3855.79,597.82 cw(c3859.7,601.73) v2(3854.17,601.73)
  Layer_5 Inner Signal 2 w3: J1.86@437.3,369.5 J1.86@438.67,368.13 ; J1.86@438.92,360.43 438.92,367.52 ccw(c466.58,367.52) 447.02,347.97 cw(c440.66,341.61) 449.66,341.61 cw(c438.26,341.61) 446.32,333.54 v1(441.34,328.57)
UPLINK22_P: CA14.1 J1.84 | length 3698.8
  Layer_1 Top w10: v2(3874.17,601.73) CA14.1@3874.17,633.23
  Layer_3 Inner Signal 1 w2.95: v1(465.34,328.57) cw(c486.24,349.46) 456.69,349.46 456.69,428.79 cw(c530.9,428.79) 478.43,481.26 cw(c536.97,422.71) 536.97,505.51 3602.48,505.51 cw(c3602.48,503.81) 3603.68,505.01 3603.95,504.75 3775.79,504.75 ccw(c3775.79,606.68) 3794.81,506.54 ccw(c3775.79,606.68) 3847.83,534.56 ccw(c3775.79,606.68) 3847.87,534.6 3854.66,541.4 ; 3854.68,541.42 ccw(c3821.96,574.1) 3868.21,574.1 3868.21,587.33 cw(c3883.05,587.33) 3872.55,597.82 ccw(c3868.65,601.73) v2(3874.17,601.73)
  Layer_5 Inner Signal 2 w3: v1(465.34,328.57) 460.69,333.22 cw(c469.86,342.39) 456.89,342.39 cw(c465.08,342.39) 459.28,348.17 460.45,349.34 ccw(c440.28,369.5) J1.84@468.8,369.5
UPLINK23_N: CA15.2 J1.92 | length 3795.7
  Layer_1 Top w10: v2(3804.96,798.58) CA15.2@3804.96,830.08
  Layer_5 Inner Signal 2 w2.95: J1.92@342.81,369.5 cw(c372.44,369.5) 351.49,390.45 352.38,391.33 ccw(c344.69,399.02) 355.56,399.02 355.56,435.59 cw(c448.41,435.59) 382.76,501.24 388.47,506.95 cw(c464.16,431.26) 464.16,538.31 3602.48,538.31 cw(c3603.96,536.83) 3603.96,538.92 3612.6,538.92 ccw(c3612.6,543.6) 3615.91,540.29 3633.1,557.48 ccw(c3615.86,574.71) 3640.24,574.71 3640.24,633.49 cw(c3748.14,633.49) 3671.84,709.79 3685.46,723.41 cw(c3738.72,670.15) 3738.72,745.47 3774.88,745.47 ccw(c3774.88,782.88) 3801.33,756.43 ccw(c3778.17,779.59) 3810.93,779.59 3810.93,784.18 ccw(c3796.09,784.18) 3806.58,794.68 cw(c3810.49,798.58) v2(3804.96,798.58)
UPLINK23_P: CA15.1 J1.90 | length 3798.1
  Layer_1 Top w10: v2(3824.96,798.58) CA15.1@3824.96,830.08
  Layer_5 Inner Signal 2 w2.95: J1.90@374.31,369.5 ccw(c340.64,369.5) 364.94,392.8 ccw(c340.64,369.5) 364.39,393.37 cw(c371.42,400.28) 362.26,396.65 362.26,435.59 cw(c448.41,435.59) 387.52,496.54 393.23,502.25 cw(c464.16,431.26) 464.16,531.61 3602.48,531.61 cw(c3602.48,529.92) 3603.68,531.12 3603.95,530.85 3612.65,530.85 ccw(c3612.65,543.48) 3621.58,534.55 3641.17,554.14 ccw(c3623.93,571.37) 3648.31,571.37 3648.31,633.42 cw(c3748.31,633.42) 3677.6,704.13 3691.14,717.68 cw(c3738.76,670.06) 3738.76,737.4 3774.91,737.4 ccw(c3774.91,782.8) 3807.01,750.7 3807.07,750.76 ccw(c3778.29,779.54) 3807.13,750.81 ccw(c3778.29,779.54) 3819,779.54 3819,784.18 cw(c3833.83,784.18) 3823.34,794.68 ccw(c3819.43,798.58) v2(3824.96,798.58)
pads on no net: J1.1 J1.2 J1.MH1 J1.MH2

## Polygon pours and split planes (outlines as drawn)
GND on Layer_6 GND Plane 3 "Layer_6 GND Plane 3-GND" (solid, pour order 0): 3601.99,1087.6 3601.99,17.68 4586.99,17.68 4586.99,1087.6
GND on Layer_2 GND Plane 1 (split plane): 4586.2,20.1 3602.7,20.1 3602.7,597.65 3602.77,598.43 3602.77,1082.27 4586.2,1082.27
GND on Layer_4 GND Plane 2 (split plane): 4586.2,20.1 20.1,20.1 20.1,531.08 3531.5,531.08 3539.28,531.08 3541.2,531.27 3543.15,531.46 3548.16,532.44 3553.18,533.43 3555.04,533.99 3556.89,534.54 3561.72,536.51 3562.4,536.87 3563.12,537.14 3569.03,540.1 3570.35,540.93 3571.7,541.7 3577.53,545.86 3578.79,546.95 3580.08,548.01 3583.92,551.85 3584.99,553.16 3586.1,554.43 3587.88,556.94 3590.62,560.44 3591.45,561.74 3592.33,563 3593.41,564.92 3593.7,565.58 3594.07,566.2 3595.01,568.2 3595.94,570.19 3596.93,572.28 3597.15,572.9 3597.45,573.49 3598.58,576.37 3598.87,577.39 3599.25,578.39 3600.09,581.43 3600.16,581.85 3600.29,582.24 3601.39,587.02 3601.52,588.03 3601.75,589.03 3602.62,595.92 3602.65,597.17 3602.77,598.43 3602.77,1082.27 4586.2,1082.27

## Other copper
Layer_1 Top:
  text "1" at 4905.6,-399.07 h45
  text "Layer_1 Top" at 3034,-399.67 h45
Layer_3 Inner Signal 1:
  text "Layer_3 Inner Signal 1" at 3034,-399.67 h45
  text "3" at 4890,-405.07 h45
Layer_5 Inner Signal 2:
  text "5" at 4884,-397.87 h45
  text "Layer_5 Inner Signal 2" at 3034,-399.67 h45
Layer_6 GND Plane 3:
  text "Layer_6 GND Plane 3" at 3034,-399.67 h45
  text "6" at 4894.8,-400.27 h45
Layer_7 Bottom:
  text "Layer_7 Bottom" at 3034,-399.67 h45
  text "7" at 4890,-405.07 h45
Layer_2 GND Plane 1 (plane layer: these items are gaps in the copper):
  lines w20: 3592.61,4.74 3592.61,607.24
  text "Layer_2 GND Plane 1" at 3034,-399.67 h45
  text "2" at 4894.8,-400.27 h45
Layer_4 GND Plane 2 (plane layer: these items are gaps in the copper):
  text "4" at 4890,-396.67 h45
  text "Layer_4 GND Plane 2" at 3034,-399.67 h45
Multi-Layer:
  text "." at -87.6,1205.71 h60

## Silkscreen, mask and mechanical layers (free items; w line width, h text height)
Flex Region Top Overlay 1:
  text "10" at 4870.8,-400.27 h45
  text "Silkscreen Top" at 3056.8,-402.67 h45
Flex Rigion Bottom:
  drawing of 990 lines, arcs and shapes, not listed
  text "11" at 4874.5,-402.77 h45
  text "Silkscreen Bottom" at 3061,-406.37 h45
Top Paste:
  text "12" at 4884,-397.87 h45
  text "Solder Paste Top" at 3056.8,-402.67 h45
Bottom Paste:
  rectangle: 1750.37,347.93 1770.45,391.63
  rectangle: 1718.88,347.93 1738.96,391.63
  rectangle: 1687.38,347.93 1707.46,391.63
  rectangle: 1655.88,347.93 1675.96,391.63
  rectangle: 1624.39,347.93 1644.47,391.63
  rectangle: 1592.89,347.93 1612.97,391.63
  rectangle: 1561.4,347.93 1581.48,391.63
  rectangle: 1529.9,347.93 1549.98,391.63
  rectangle: 1498.4,347.93 1518.48,391.63
  rectangle: 1466.91,347.93 1486.99,391.63
  rectangle: 1435.41,347.93 1455.49,391.63
  rectangle: 1403.92,347.93 1424,391.63
  rectangle: 1372.42,347.93 1392.5,391.63
  rectangle: 1340.92,347.93 1361,391.63
  rectangle: 1309.43,347.93 1329.51,391.63
  rectangle: 1277.93,347.93 1298.01,391.63
  rectangle: 1246.44,347.93 1266.51,391.63
  rectangle: 1214.94,347.93 1235.02,391.63
  rectangle: 1183.44,347.93 1203.52,391.63
  rectangle: 1151.95,347.93 1172.03,391.63
  rectangle: 1120.45,347.93 1140.53,391.63
  rectangle: 1088.96,347.93 1109.03,391.63
  rectangle: 1057.46,347.93 1077.54,391.63
  rectangle: 1025.96,347.93 1046.04,391.63
  rectangle: 994.47,347.93 1014.55,391.63
  rectangle: 962.97,347.93 983.05,391.63
  rectangle: 931.48,347.93 951.55,391.63
  rectangle: 899.98,347.93 920.06,391.63
  rectangle: 868.48,347.93 888.56,391.63
  rectangle: 836.99,347.93 857.07,391.63
  rectangle: 805.49,347.93 825.57,391.63
  rectangle: 774,347.93 794.07,391.63
  rectangle: 742.5,347.93 762.58,391.63
  rectangle: 711,347.93 731.08,391.63
  rectangle: 679.51,347.93 699.59,391.63
  rectangle: 648.01,347.93 668.09,391.63
  rectangle: 616.51,347.93 636.59,391.63
  rectangle: 585.02,347.93 605.1,391.63
  rectangle: 553.52,347.93 573.6,391.63
  rectangle: 522.03,347.93 542.11,391.63
  rectangle: 490.53,347.93 510.61,391.63
  rectangle: 459.03,347.93 479.11,391.63
  rectangle: 427.54,347.93 447.62,391.63
  rectangle: 396.04,347.93 416.12,391.63
  rectangle: 364.55,347.93 384.62,391.63
  rectangle: 333.05,347.93 353.13,391.63
  rectangle: 301.55,347.93 321.63,391.63
  rectangle: 270.06,347.93 290.14,391.63
  rectangle: 238.56,347.93 258.64,391.63
  rectangle: 207.07,347.93 227.14,391.63
  rectangle: 206.77,347.64 226.85,391.34
  rectangle: 1749.78,170.32 1769.86,214.02
  rectangle: 1718.29,170.32 1738.37,214.02
  rectangle: 1686.79,170.32 1706.87,214.02
  rectangle: 1655.3,170.32 1675.37,214.02
  rectangle: 1623.8,170.32 1643.88,214.02
  rectangle: 1592.3,170.32 1612.38,214.02
  rectangle: 1560.81,170.32 1580.89,214.02
  rectangle: 1529.31,170.32 1549.39,214.02
  rectangle: 1497.82,170.32 1517.89,214.02
  rectangle: 1466.32,170.32 1486.4,214.02
  rectangle: 1434.82,170.32 1454.9,214.02
  rectangle: 1403.33,170.32 1423.41,214.02
  rectangle: 1371.83,170.32 1391.91,214.02
  rectangle: 1340.34,170.32 1360.41,214.02
  rectangle: 1308.84,170.32 1328.92,214.02
  rectangle: 1277.34,170.32 1297.42,214.02
  rectangle: 1245.85,170.32 1265.93,214.02
  rectangle: 1214.35,170.32 1234.43,214.02
  rectangle: 1182.86,170.32 1202.93,214.02
  rectangle: 1151.36,170.32 1171.44,214.02
  rectangle: 1119.86,170.32 1139.94,214.02
  rectangle: 1088.37,170.32 1108.45,214.02
  rectangle: 1056.87,170.32 1076.95,214.02
  rectangle: 1025.37,170.32 1045.45,214.02
  rectangle: 993.88,170.32 1013.96,214.02
  rectangle: 962.38,170.32 982.46,214.02
  rectangle: 930.89,170.32 950.97,214.02
  rectangle: 899.39,170.32 919.47,214.02
  rectangle: 867.89,170.32 887.97,214.02
  rectangle: 836.4,170.32 856.48,214.02
  rectangle: 804.9,170.32 824.98,214.02
  rectangle: 773.41,170.32 793.49,214.02
  rectangle: 741.91,170.32 761.99,214.02
  rectangle: 710.41,170.32 730.49,214.02
  rectangle: 678.92,170.32 699,214.02
  rectangle: 647.42,170.32 667.5,214.02
  rectangle: 615.93,170.32 636,214.02
  rectangle: 584.43,170.32 604.51,214.02
  rectangle: 552.93,170.32 573.01,214.02
  rectangle: 521.44,170.32 541.52,214.02
  rectangle: 489.94,170.32 510.02,214.02
  rectangle: 458.45,170.32 478.52,214.02
  rectangle: 426.95,170.32 447.03,214.02
  rectangle: 395.45,170.32 415.53,214.02
  rectangle: 363.96,170.32 384.04,214.02
  rectangle: 332.46,170.32 352.54,214.02
  rectangle: 300.97,170.32 321.04,214.02
  rectangle: 269.47,170.32 289.55,214.02
  rectangle: 237.97,170.32 258.05,214.02
  rectangle: 206.48,170.32 226.56,214.02
  rectangle: 206.77,170.61 226.85,214.31
  text "Solder Paste Bottom" at 3071.5,-402.97 h45
  text "13" at 4900,-409.77 h45
Flex Region Top Coverlay 1:
  lines w60: 108.06,77.8 cw(c74.8,78.74) 108.06,79.67 ; 108.06,479.37 cw(c74.8,480.32) 108.06,481.25
  text "Solder Mask Top" at 3078,-402.57 h45
  text "8" at 4916.9,-406.17 h45
Flex Region Bottom Coverlay 1:
  rectangle: 1750.28,347.83 1769.96,391.14
  rectangle: 1718.78,347.83 1738.46,391.14
  rectangle: 1687.28,347.83 1706.97,391.14
  rectangle: 1655.79,347.83 1675.47,391.14
  rectangle: 1624.29,347.83 1643.98,391.14
  rectangle: 1592.8,347.83 1612.48,391.14
  rectangle: 1561.3,347.83 1580.98,391.14
  rectangle: 1529.8,347.83 1549.49,391.14
  rectangle: 1498.31,347.83 1517.99,391.14
  rectangle: 1466.81,347.83 1486.5,391.14
  rectangle: 1435.32,347.83 1455,391.14
  rectangle: 1403.82,347.83 1423.5,391.14
  rectangle: 1372.32,347.83 1392.01,391.14
  rectangle: 1340.83,347.83 1360.51,391.14
  rectangle: 1309.33,347.83 1329.02,391.14
  rectangle: 1277.83,347.83 1297.52,391.14
  rectangle: 1246.34,347.83 1266.02,391.14
  rectangle: 1214.84,347.83 1234.53,391.14
  rectangle: 1183.35,347.83 1203.03,391.14
  rectangle: 1151.85,347.83 1171.54,391.14
  rectangle: 1120.35,347.83 1140.04,391.14
  rectangle: 1088.86,347.83 1108.54,391.14
  rectangle: 1057.36,347.83 1077.05,391.14
  rectangle: 1025.87,347.83 1045.55,391.14
  rectangle: 994.37,347.83 1014.06,391.14
  rectangle: 962.87,347.83 982.56,391.14
  rectangle: 931.38,347.83 951.06,391.14
  rectangle: 899.88,347.83 919.57,391.14
  rectangle: 868.39,347.83 888.07,391.14
  rectangle: 836.89,347.83 856.57,391.14
  rectangle: 805.39,347.83 825.08,391.14
  rectangle: 773.9,347.83 793.58,391.14
  rectangle: 742.4,347.83 762.09,391.14
  rectangle: 710.91,347.83 730.59,391.14
  rectangle: 679.41,347.83 699.09,391.14
  rectangle: 647.91,347.83 667.6,391.14
  rectangle: 616.42,347.83 636.1,391.14
  rectangle: 584.92,347.83 604.61,391.14
  rectangle: 553.43,347.83 573.11,391.14
  rectangle: 521.93,347.83 541.61,391.14
  rectangle: 490.43,347.83 510.12,391.14
  rectangle: 458.94,347.83 478.62,391.14
  rectangle: 427.44,347.83 447.13,391.14
  rectangle: 395.94,347.83 415.63,391.14
  rectangle: 364.45,347.83 384.13,391.14
  rectangle: 332.95,347.83 352.64,391.14
  rectangle: 301.46,347.83 321.14,391.14
  rectangle: 269.96,347.83 289.65,391.14
  rectangle: 238.46,347.83 258.15,391.14
  rectangle: 206.97,347.83 226.65,391.14
  rectangle: 206.97,347.83 226.65,391.14
  rectangle: 1750.28,170.67 1769.96,213.98
  rectangle: 1718.78,170.67 1738.46,213.98
  rectangle: 1687.28,170.67 1706.97,213.98
  rectangle: 1655.79,170.67 1675.47,213.98
  rectangle: 1624.29,170.67 1643.98,213.98
  rectangle: 1592.8,170.67 1612.48,213.98
  rectangle: 1561.3,170.67 1580.98,213.98
  rectangle: 1529.8,170.67 1549.49,213.98
  rectangle: 1498.31,170.67 1517.99,213.98
  rectangle: 1466.81,170.67 1486.5,213.98
  rectangle: 1435.32,170.67 1455,213.98
  rectangle: 1403.82,170.67 1423.5,213.98
  rectangle: 1372.32,170.67 1392.01,213.98
  rectangle: 1340.83,170.67 1360.51,213.98
  rectangle: 1309.33,170.67 1329.02,213.98
  rectangle: 1277.83,170.67 1297.52,213.98
  rectangle: 1246.34,170.67 1266.02,213.98
  rectangle: 1214.84,170.67 1234.53,213.98
  rectangle: 1183.35,170.67 1203.03,213.98
  rectangle: 1151.85,170.67 1171.54,213.98
  rectangle: 1120.35,170.67 1140.04,213.98
  rectangle: 1088.86,170.67 1108.54,213.98
  rectangle: 1057.36,170.67 1077.05,213.98
  rectangle: 1025.87,170.67 1045.55,213.98
  rectangle: 994.37,170.67 1014.06,213.98
  rectangle: 962.87,170.67 982.56,213.98
  rectangle: 931.38,170.67 951.06,213.98
  rectangle: 899.88,170.67 919.57,213.98
  rectangle: 868.39,170.67 888.07,213.98
  rectangle: 836.89,170.67 856.57,213.98
  rectangle: 805.39,170.67 825.08,213.98
  rectangle: 773.9,170.67 793.58,213.98
  rectangle: 742.4,170.67 762.09,213.98
  rectangle: 710.91,170.67 730.59,213.98
  rectangle: 679.41,170.67 699.09,213.98
  rectangle: 647.91,170.67 667.6,213.98
  rectangle: 616.42,170.67 636.1,213.98
  rectangle: 584.92,170.67 604.61,213.98
  rectangle: 553.43,170.67 573.11,213.98
  rectangle: 521.93,170.67 541.61,213.98
  rectangle: 490.43,170.67 510.12,213.98
  rectangle: 458.94,170.67 478.62,213.98
  rectangle: 427.44,170.67 447.13,213.98
  rectangle: 395.94,170.67 415.63,213.98
  rectangle: 364.45,170.67 384.13,213.98
  rectangle: 332.95,170.67 352.64,213.98
  rectangle: 301.46,170.67 321.14,213.98
  rectangle: 269.96,170.67 289.65,213.98
  rectangle: 238.46,170.67 258.15,213.98
  rectangle: 206.97,170.67 226.65,213.98
  rectangle: 206.97,170.67 226.65,213.98
  lines w60: 108.06,77.8 cw(c74.8,78.74) 108.06,79.67 ; 108.06,479.37 cw(c74.8,480.32) 108.06,481.25
  text "Solder Mask Bottom" at 3056.8,-402.67 h45
  text "9" at 4892.4,-402.67 h45
Title Block:
  drawing of 2814 lines, arcs and shapes, not listed
  text "SHT" at 4628.68,-403.16 h45
  text "OF" at 5078.68,-408.16 h45
  text "U.S. DEPARTMENT OF" at 1593.68,-458.16 h125
  text "ENERGY" at 1923.68,-613.16 h125
  text ".Line1_TB_Top_Level_Assembly" at 2933.68,-633.16 h70
  text "NATIONAL ACCELERATOR LABORATORY" at 157.95,-751.27 h50
  text ".Line2_TB_Project_Name" at 2949.61,-782.28 h70
  text ".Line3_TB_Board_Name" at 2939,-942.47 h70
  text "ENGR:" at 178.67,-963.16 h45
  text ".SLAC_ENGINEER" at 454.67,-963.16 h45
  text "DATE:" at 1408.67,-963.16 h45
  text ".SLAC_ENG_DATE" at 1644.67,-963.16 h45
  text "CHKR:" at 178.67,-1113.16 h45
  text ".SLAC_CHECKER" at 457.67,-1113.16 h45
  text "DATE:" at 1401.67,-1113.16 h45
  text ".SLAC_CHK_DATE" at 1647.67,-1113.16 h45
  text "REVISION" at 4823.68,-1173.16 h40
  text ".PC_NUMBER" at 3173.68,-1253.16 h70
  text "DSGN:" at 178.67,-1263.16 h45
  text ".SLAC_PCB_DSGN" at 457.67,-1263.16 h45
  text "DATE:" at 1404.67,-1263.16 h45
  text ".SLAC_PCB_DSGN_DATE" at 1651.67,-1263.16 h45
  text "B" at 5253.67,-1263.16 h70
  text ".PC_Revision" at 4883.68,-1273.16 h70
  text ".Print_Time" at 3685.11,-1385.62 h45
  text ".Print_Date" at 3230.11,-1390.62 h45
  text ".SPIRES" at 4260.11,-1390.62 h45
Label Layer:
  text "14" at 5233,-405.07 h45
  text "PC-" at 2945.6,-1251.27 h70
Assembly Top:
  text "Top Assembly Drawing" at 3042.1,-385.97 h45
  text "1" at 4925.4,-401.07 h45
  text "2" at 5258.4,-406.07 h45
  text "SA-" at 2945.6,-1251.27 h70
Assembly Bottom:
  text "Bottom Assembly Drawing" at 3065.9,-389.37 h45
  text "2" at 4907.6,-400.77 h45
  text "2" at 5266.5,-406.27 h45
  text "SA-" at 2945.6,-1251.27 h70
Drill Drawing:
  drawing of 685 lines, arcs and shapes, not listed
  text "Layer" at -58.85,5925 h60
  text "Name" at 351.06,5925 h60
  text "Material" at 2140.53,5925 h60
  text "Thickness" at 3400.16,5925 h60
  text "Constant" at 4050,5925 h60
  text "Flex Region" at 4619.86,5925 h60
  text "Rigid Region" at 5379.66,5925 h60
  text "Top Overlay" at 351.06,5805 h60
  text "Top Solder" at 351.06,5685 h60
  text "Solder Resist" at 2140.53,5685 h60
  text "0.40mil" at 3400.16,5685 h60
  text "3.5" at 4050,5685 h60
  text "Flex Region Top Overlay 1" at 351.06,5565 h60
  text "Flex Region Top Coverlay 1" at 351.06,5445 h60
  text "FC-002" at 2140.53,5445 h60
  text "0.47mil" at 3400.16,5445 h60
  text "3.9" at 4050,5445 h60
  text "1" at -58.85,5325 h60
  text "Layer_1 Top" at 351.06,5325 h60
  text "0.70mil" at 3400.16,5325 h60
  text "Dielectric 1" at 351.06,5205 h60
  text "I-TERA MT40" at 2140.53,5205 h60
  text "6.60mil" at 3400.16,5205 h60
  text "3.45" at 4050,5205 h60
  text "2" at -58.85,5085 h60
  text "Layer_2 GND Plane 1" at 351.06,5085 h60
  text "1.40mil" at 3400.16,5085 h60
  text "Dielectric 2" at 351.06,4965 h60
  text "Composite dielectric" at 2140.53,4965 h60
  text "2.76mil" at 3400.16,4965 h60
  text "3.48" at 4050,4965 h60
  text "Dielectric 2a" at 351.06,4845 h60
  text "FR0110" at 2140.53,4845 h60
  text "4.20mil" at 3400.16,4845 h60
  text "3.9" at 4050,4845 h60
  text "3" at -58.85,4725 h60
  text "Layer_3 Inner Signal 1" at 351.06,4725 h60
  text "0.50mil" at 3400.16,4725 h60
  text "Dielectric 3" at 351.06,4605 h60
  text "Composite dielectric" at 2140.53,4605 h60
  text "3.00mil" at 3400.16,4605 h60
  text "3" at 4050,4605 h60
  text "Dielectric 3a" at 351.06,4485 h60
  text "Composite dielectric" at 2140.53,4485 h60
  text "0.90mil" at 3400.16,4485 h60
  text "3" at 4050,4485 h60
  text "4" at -58.85,4365 h60
  text "Layer_4 GND Plane 2" at 351.06,4365 h60
  text "0.50mil" at 3400.16,4365 h60
  text "Dielectric 4" at 351.06,4245 h60
  text "RF775-RA" at 2140.53,4245 h60
  text "3.00mil" at 3400.16,4245 h60
  text "3" at 4050,4245 h60
  text "5" at -58.85,4125 h60
  text "Layer_5 Inner Signal 2" at 351.06,4125 h60
  text "0.50mil" at 3400.16,4125 h60
  text "Dielectric 5" at 351.06,4005 h60
  text "Composite dielectric" at 2140.53,4005 h60
  text "1.60mil" at 3400.16,4005 h60
  text "3.48" at 4050,4005 h60
  text "Dielectric 5a" at 351.06,3885 h60
  text "Composite dielectric" at 2140.53,3885 h60
  text "2.76mil" at 3400.16,3885 h60
  text "3.48" at 4050,3885 h60
  text "6" at -58.85,3765 h60
  text "Layer_6 GND Plane 3" at 351.06,3765 h60
  text "1.40mil" at 3400.16,3765 h60
  text "Dielectric 6" at 351.06,3645 h60
  text "I-TERA MT40" at 2140.53,3645 h60
  text "6.60mil" at 3400.16,3645 h60
  text "3.45" at 4050,3645 h60
  text "7" at -58.85,3525 h60
  text "Layer_7 Bottom" at 351.06,3525 h60
  text "0.70mil" at 3400.16,3525 h60
  text "Bottom Overlay" at 351.06,3405 h60
  text "Flex Region Bottom Coverlay 1" at 351.06,3285 h60
  text "FC-100" at 2140.53,3285 h60
  text "0.05mil" at 3400.16,3285 h60
  text "3.4" at 4050,3285 h60
  text "Flex Rigion Bottom" at 351.06,3165 h60
  text "Symbol" at -60.08,2769.99 h72
  text "Count" at 445.8,2769.99 h72
  text "Hole Size" at 1035.64,2769.99 h72
  text "Plated" at 2135.32,2769.99 h72
  text "Hole Type" at 2641.2,2769.99 h72
  text "Drill Layer Pair" at 3375,2769.99 h72
  text "Pad Shape" at 5114.47,2769.99 h72
  text "64" at 445.8,2619.99 h60
  text "6.00mil (0.152mm)" at 1035.64,2619.99 h60
  text "PTH" at 2135.32,2619.99 h60
  text "Round" at 2641.2,2619.99 h60
  text "Layer_1 Top - Layer_7 Bottom" at 3375,2619.99 h60
  text "Rounded" at 5114.47,2619.99 h60
  text "98" at 445.8,2469.99 h60
  text "8.00mil (0.203mm)" at 1035.64,2469.99 h60
  text "PTH" at 2135.32,2469.99 h60
  text "Round" at 2641.2,2469.99 h60
  text "(Mixed)" at 3375,2469.99 h60
  text "Rounded" at 5114.47,2469.99 h60
  text "2" at 445.8,2319.99 h60
  text "32.68mil (0.830mm)" at 1035.64,2319.99 h60
  text "NPTH" at 2135.32,2319.99 h60
  text "Round" at 2641.2,2319.99 h60
  text "Layer_1 Top - Layer_7 Bottom" at 3375,2319.99 h60
  text "Rounded" at 5114.47,2319.99 h60
  text "This should be on flex area (Layer_3 - Layer_5)" at 7008.92,2317.16 h45
  text "This should be on flex area (Layer_3 - Layer_5)" at 7015,2180 h45
  text "2" at 445.8,2169.99 h60
  text "57.09mil (1.450mm)" at 1035.64,2169.99 h60
  text "NPTH" at 2135.32,2169.99 h60
  text "Round" at 2641.2,2169.99 h60
  text "Layer_1 Top - Layer_7 Bottom" at 3375,2169.99 h60
  text "Rounded" at 5114.47,2169.99 h60
  text "2" at 445.8,2019.99 h60
  text "90.00mil (2.286mm)" at 1035.64,2019.99 h60
  text "PTH" at 2135.32,2019.99 h60
  text "Round" at 2641.2,2019.99 h60
  text "Layer_1 Top - Layer_7 Bottom" at 3375,2019.99 h60
  text "Rounded" at 5114.47,2019.99 h60
  text "2" at 445.8,1869.99 h60
  text "95.00mil (2.413mm)" at 1035.64,1869.99 h60
  text "PTH" at 2135.32,1869.99 h60
  text "Round" at 2641.2,1869.99 h60
  text "Layer_1 Top - Layer_7 Bottom" at 3375,1869.99 h60
  text "Rounded" at 5114.47,1869.99 h60
  text "170 Total" at 445.8,1719.99 h60
  text "NOTES: (UNLESS OTHERWISE SPECIFIED)" at 5068.25,1359.43 h45
  text "1. BOARD LAYERS = 7" at 5244.36,1212.36 h45
  text "2. MATERIAL: Isola TerraGreen, Flex and Rigid." at 5239.36,1132.36 h45
  text "3. OVERALL FINISHED THICKNESS: 0.146 +/-0.005\"" at 5232,1045.75 h45
  text "4. PLATE THROUGH ALL HOLES" at 5232,955.75 h45
  text "5. HOLE SIZES IN DRILL CHART ARE FINISHED DIAMETERS, SHALL HAVE A TOLERANCE OF +/- .003\"." at 5232,860.75 h45
  text "Bending Line" at 1894.49,787.01 h60
  text "6. FINISH: ENIG" at 5232,770.75 h45
  text "7. SOLDERMASK: LPI, COLOR=GREEN ON BOTH SIDE." at 5227,685.75 h45
  text "Min R" at 2803.15,663.39 h60
  text "8. SILKSCREEN: WHITE NON-CONDUCTIVE EPOXY INK" at 5232,605.75 h45
  text "9. BOARD MUST MEET IPC-A-600 CLASS 2, LESS" at 5232,515.75 h45
  text "THAN 1.5% BOW AND TWIST, AND UL STANDARDS" at 5337.28,426.18 h45
  text "10. 100% ELECTRICAL TEST OF ALL NETS." at 5197,335.75 h45
  text "11. MARK BOARD SHOWING MANUFACTURER ID AND DATE CODE" at 5207,260.75 h45
  text "12. TRIM BOARD ALONG TRIM LINE AND BREAK ALL SHARP EDGES." at 5197,175.75 h45
  text "J1 RIGID SUPPORT LOCATION" at 570,140 h40
  text "13. ADD RIGID SUPPORT FOR J1 ON TOP SIDE OF THE FLEX SECTION." at 5191.8,90.15 h45
  text "(40.7mm X7.72mm)" at 660,55 h40
  text "14. ALL DIFFERENTIAL PAIR ARE CONTROLLED IMPEDANCE AT 100 OHMS +/-10% ON LAYER 3 AND 5, FLEX REGION (3/3/3), REGID REGION (5.5/5/5.5)." at 5181.1,1.97 h50
  text "15. THE 4 NON-PLATED HOLES ARE ON THE FLEX AREA." at 5195.08,-100.24 h50
  text "14" at 4879.2,-400.27 h45
  text "Fab & Drill Drawing" at 3120,-403.47 h45

## Dimensions
1760.14,192.33 to 2125.98,592.52 on Drill Drawing
1789.37,428.74 to 187.01,428.74 on Drill Drawing
187.01,124.8 to 187.01,428.74 on Drill Drawing
0,0 to 187.01,124.8 on Drill Drawing
187.01,428.74 to 0,551.18 on Drill Drawing
0,0 to 2125.98,749.61 on Drill Drawing
3539.37,551.18 to 3582.68,1102.36 on Drill Drawing
0,551.18 to 3582.68,1102.36 on Drill Drawing
3582.68,1102.36 to 4606.3,1102.36 on Drill Drawing
4606.3,1102.36 to 4606.3,0 on Drill Drawing
4606.3,0 to 0,0 on Drill Drawing
0,0 to 0,551.18 on Drill Drawing